# Altium PCB MS9333_PCB.PcbDoc
Units mil, origin at the board's own origin, x right, y up, seen from the top; angles counter-clockwise.
Board outline not stored, 2 copper layers (Top Layer, Bottom Layer); 52 components, 0 nets, 190 pads, 0 vias.
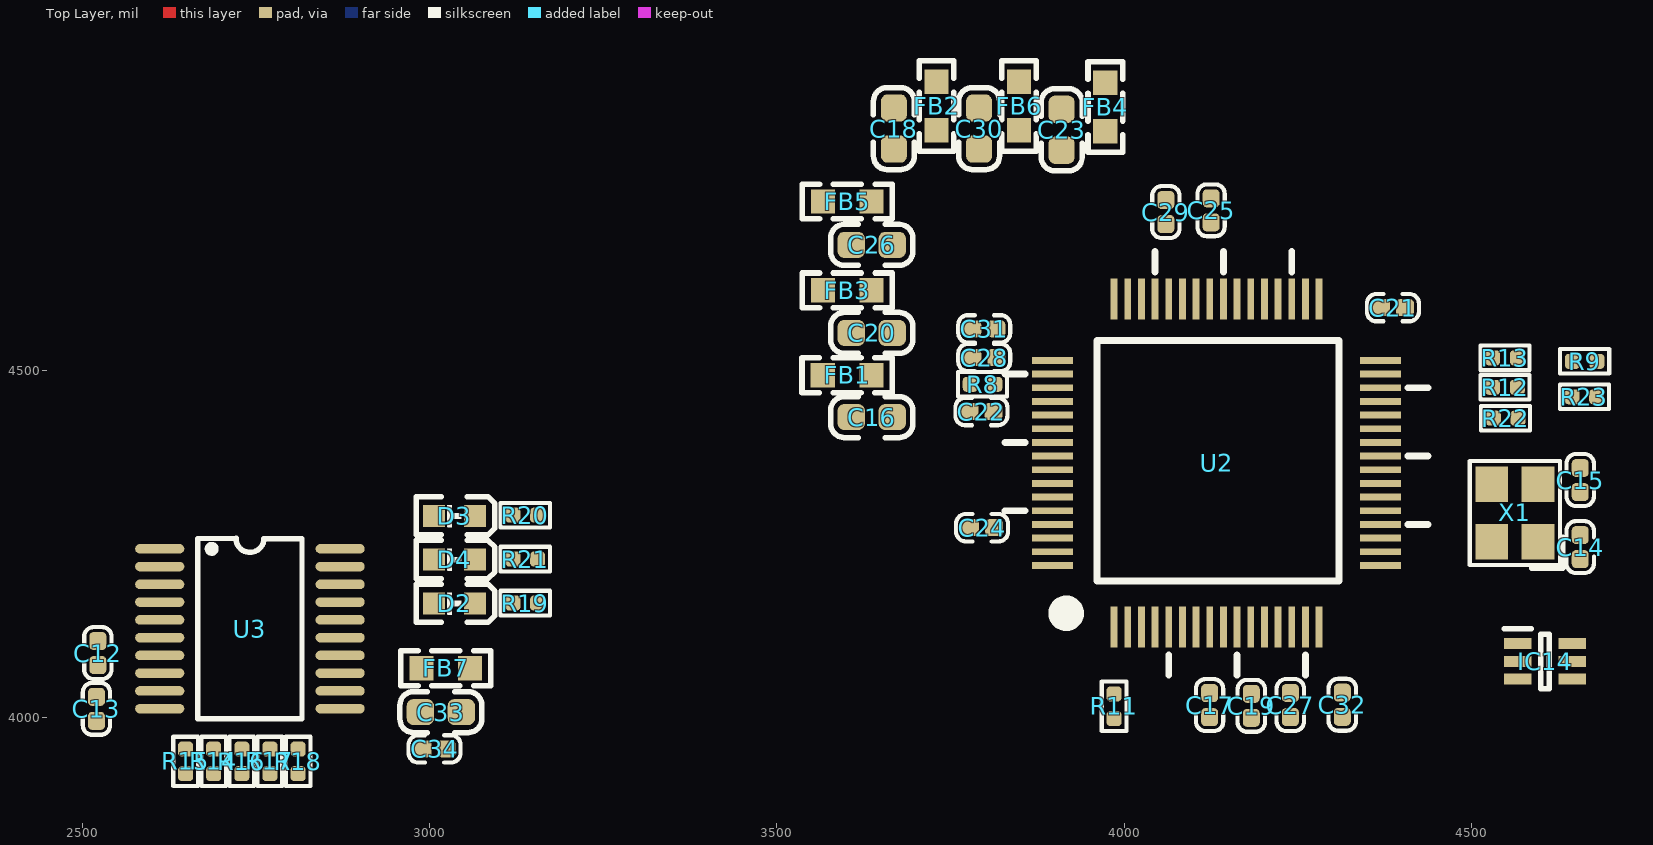
[diagram p0: Top Layer view]
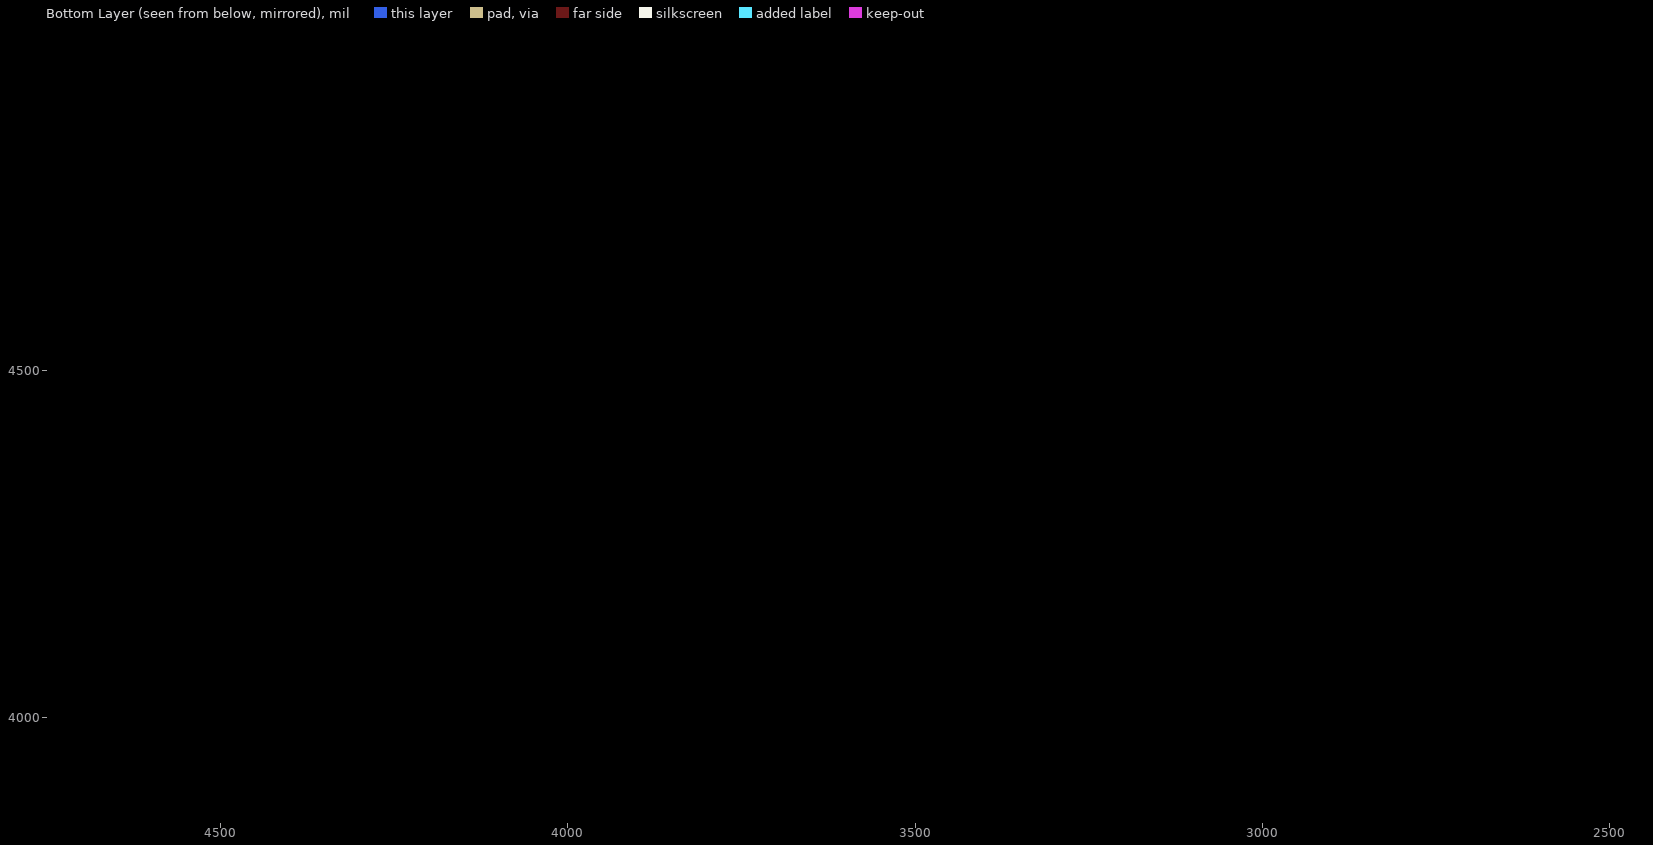
[diagram p1: Bottom Layer view, seen from below]

## Layer stack, top to bottom
Top Solder: solder mask 0.4, Solder Resist, Dk 3.5
Top Layer: signal copper 1.4
Dielectric 1: dielectric 12.6, FR-4, Dk 4.8
Bottom Layer: signal copper 1.4
Bottom Solder: solder mask 0.4, Solder Resist, Dk 3.5

## Components (designator, comment, footprint, x,y, rotation, side; value= is the part's Value field where it differs from the comment)
C12 "1uF" C_0402 2522.08,4093.35 r270 top
C13 "1uF" C_0402 2520.08,4013.03 r270 top
C14 "22pF" C_0402 4656.74,4245.95 r270 top
C15 "22pF" C_0402 4656.74,4342.52 r270 top
C16 "10uF" C_0603 3636.5,4433.19 r180 top
C17 "100nF" C_0402 4123.08,4018.35 r270 top
C18 "10uF" C_0603 3668.5,4848.62 r90 top
C19 "100nF" C_0402 4183.08,4017.35 r270 top
C20 "10uF" C_0603 3636.5,4554.35 r180 top
C21 "100nF" C_0402 4387.01,4590.75 r0 top
C22 "100nF" C_0402 3794.49,4441.14 r180 top
C23 "10uF" C_0603 3910.02,4846.94 r90 top
C24 "100nF" C_0402 3795.47,4273.82 r180 top
C25 "100nF" C_0402 4125.2,4730.91 r90 top
C26 "10uF" C_0603 3636.5,4681.19 r180 top
C27 "100nF" C_0402 4239.31,4018.51 r270 top
C28 "100nF" C_0402 3798.57,4518.84 r180 top
C29 "100nF" C_0402 4060.08,4728.35 r90 top
C30 "10uF" C_0603 3791.14,4848.62 r90 top
C31 "100nF" C_0402 3798.57,4560.18 r180 top
C32 "100nF" C_0402 4314.17,4018.9 r270 top
C33 "10uF" C_0603 3016.08,4008.35 r0 top
C34 "100nF" C_0402 3007.08,3955.35 r0 top
D2 "Green" LED-0603-G 3035.64,4164.95 r0 top
D3 "Green" LED-0603-G 3035.64,4290.93 r0 top
D4 "Green" LED-0603-G 3035.64,4228.02 r0 top
FB1 "CBG160808U121T" 0603L 3601.08,4493.35 r0 top
FB2 "CBG160808U121T" 0603L 3729.83,4881.23 r270 top
FB3 "CBG160808U121T" 0603L 3601.27,4615.63 r0 top
FB4 "CBG160808U121T" 0603L 3972.91,4879.54 r270 top
FB5 "CBG160808U121T" 0603L 3601.27,4743.59 r0 top
FB6 "CBG160808U121T" 0603L 3848.72,4881.23 r270 top
FB7 "CBG160808U121T" 0603L 3023.08,4071.35 r180 top
IC14 "TS5A3159DCKR" SOT65P210X110-6N 4606.08,4081.35 r0 top
R8 "0Ω" R_0402 3796.08,4480.35 r180 top
R9 "20kΩ" R_0402 4663.08,4513.35 r0 top
R11 "10kΩ" R_0402 3985.43,4016.71 r90 top
R12 "10kΩ" R_0402 4548.44,4475.97 r180 top
R13 "10kΩ" R_0402 4548.44,4518.29 r180 top
R14 "10kΩ" R_0402 2688.86,3937.35 r90 top
R15 "10kΩ" R_0402 2648.36,3937.35 r90 top
R16 "10kΩ" R_0402 2729.36,3937.35 r90 top
R17 "10kΩ" R_0402 2769.87,3937.35 r90 top
R18 "10kΩ" R_0402 2810.37,3937.35 r90 top
R19 "10kΩ" R_0402 3137.58,4165.28 r0 top
R20 "10kΩ" R_0402 3137.58,4291.91 r0 top
R21 "10kΩ" R_0402 3137.58,4228.72 r0 top
R22 "1kΩ" R_0402 4549.29,4431.55 r0 top
R23 "1kΩ" R_0402 4662.8,4462.35 r0 top
U2 "MS9333" LQFP64-0.5 4133.07,4367.1 r0 top locked
U3 "MS8005F" TSSOP20 2741.08,4128.35 r0 top
X1 "XTAL-4P 24Mhz" "OSC 3225-4P" 4562.68,4295.16 r90 top

## Footprints (in the part's own frame and the unit in brackets; to place one, negate y for a bottom-side part, rotate by r counter-clockwise, add the part's x,y. Pads: shape width x height; smd on the part's side, far side on the other; paste and mask are expansions set on the pad)
0603L [mil] "小功率贴片电感"
  rect 35x35 smd: 1(-35,0) 2(35,0)
  silkscreen extent -65,-25 65,25, body extent -31,-16 31,15, height 31
C_0402 [mm] "Chip Capacitor, 2-Leads, Body 1.00x0.50mm, IPC Medium Density"
  rrect50% 0.66x0.62 smd: 1(-0.44,0) 2(0.44,0)
  silkscreen extent -0.95,-0.5 0.95,0.5, body extent -0.52,-0.27 0.53,0.28, height 0.55
C_0603 [mm] "Chip Capacitor, 2-Leads, Body 1.60x0.80mm, IPC Medium Density"
  rrect50% 1x0.95 smd: 1(-0.75,0) 2(0.75,0)
  silkscreen extent -1.5,-0.75 1.5,0.75, body extent -0.8,-0.4 0.8,0.4, height 0.87
LED-0603-G [mm] "Chip Diode, 2-Leads, Body 1.55x0.80mm, IPC Medium Density"
  rect 0.8x0.8 smd: A(-0.75,0) K(0.75,0)
  silkscreen extent -1.4,-0.7 1.48,0.7, body extent -0.8,-0.4 0.8,0.4, height 0.61
LQFP64-0.5 [mm]
  rect 0.25x1.5 smd: 1(-3.75,-6) 2(-3.25,-6) 3(-2.75,-6) 4(-2.25,-6) 5(-1.75,-6) 6(-1.25,-6) 7(-0.75,-6) 8(-0.25,-6) 9(0.25,-6) 10(0.75,-6) 11(1.25,-6) 12(1.75,-6) 13(2.25,-6) 14(2.75,-6) 15(3.25,-6) 16(3.75,-6) 33(3.75,6) 34(3.25,6) 35(2.75,6) 36(2.25,6) 37(1.75,6) 38(1.25,6) 39(0.75,6) 40(0.25,6) 41(-0.25,6) 42(-0.75,6) 43(-1.25,6) 44(-1.75,6) 45(-2.25,6) 46(-2.75,6) 47(-3.25,6) 48(-3.75,6)
  rect 1.5x0.25 smd: 17(6,-3.75) 18(6,-3.25) 19(6,-2.75) 20(6,-2.25) 21(6,-1.75) 22(6,-1.25) 23(6,-0.75) 24(6,-0.25) 25(6,0.25) 26(6,0.75) 27(6,1.25) 28(6,1.75) 29(6,2.25) 30(6,2.75) 31(6,3.25) 32(6,3.75) 49(-6,3.75) 50(-6,3.25) 51(-6,2.75) 52(-6,2.25) 53(-6,1.75) 54(-6,1.25) 55(-6,0.75) 56(-6,0.25) 57(-6,-0.25) 58(-6,-0.75) 59(-6,-1.25) 60(-6,-1.75) 61(-6,-2.25) 62(-6,-2.75) 63(-6,-3.25) 64(-6,-3.75)
  silkscreen extent -7.74,-7.76 7.74,7.73, body extent -6,-5.99 6,6.02, height 1.45
"OSC 3225-4P" [mm]
  rect 1.3x1.2 smd: 1(-1.05,-0.85) 2(1.05,-0.85) 3(1.05,0.85) 4(-1.05,0.85)
  silkscreen extent -2.03,-1.75 1.91,1.65, body extent -1.6,-1.25 1.6,1.25, height 0.7
R_0402 [mm] "Chip Resistor, 2-Leads, Body 1.00x0.50mm, IPC Medium Density"
  rrect50% 0.55x0.55 smd: 1(-0.45,0) 2(0.45,0)
  silkscreen extent -0.9,-0.45 0.9,0.45, body extent -0.5,-0.27 0.5,0.28, height 0.4
SOT65P210X110-6N [mm]
  rect 1x0.4 smd: 1(-1,0.65) 2(-1,0) 3(-1,-0.65) 4(1,-0.65) 5(1,0) 6(1,0.65)
  silkscreen extent -1.5,-1 0.15,1.2, body extent -1.05,-1 1.05,1, height 1.1
TSSOP20 [mm]
  oval 1.8x0.35 smd: 1(-3.3,2.925) 2(-3.3,2.275) 3(-3.3,1.625) 4(-3.3,0.975) 5(-3.3,0.325) 6(-3.3,-0.325) 7(-3.3,-0.975) 8(-3.3,-1.625) 9(-3.3,-2.275) 10(-3.3,-2.925) 11(3.3,-2.925) 12(3.3,-2.275) 13(3.3,-1.625) 14(3.3,-0.975) 15(3.3,-0.325) 16(3.3,0.325) 17(3.3,0.975) 18(3.3,1.625) 19(3.3,2.275) 20(3.3,2.925)
  silkscreen extent -1.91,-3.3 1.91,3.3, body extent -3.28,-3.25 3.13,3.25, height 1.03

## Part data
C12 C13 C14 C15 C16 C17 C18 C19 C20 C21 C22 C23 C24 C25 C26 C27 C28 C29 C30 C31 C32 C33 C34: library part Cap_Chip, "贴片电容"
D2 D3 D4: library part LED_Chip, "贴片LED"
FB1 FB2 FB3 FB4 FB5 FB6 FB7: library part FB, "120R 100Mhz", LCSC=C50843, Manufacturer_Name=FH(风华), Manufacturer_Part_Number=CBG160808U121T
IC14: "Integrated Circuit", LCSC=C46388, Manufacturer_Name="Texas Instruments", Manufacturer_Part_Number=TS5A3159DCKR
R8 R9 R11 R12 R13 R14 R15 R16 R17 R18 R19 R20 R21 R22 R23: library part Res_Chip, "贴片电阻"
U2: "HDMI 一分二", Manufacturer_Name=MacroSilicon(宏晶微), Manufacturer_Part_Number=MS9333
U3: library part MS8005F_TSSOP20, "MCU", Manufacturer_Name=MacroSilicon(宏晶微), Manufacturer_Part_Number=MS8005F
X1: library part XTAL-4P, "4脚无源晶振", LCSC=C426976, Manufacturer_Name=GHC(晶光华), Manufacturer_Part_Number=S3224000151050

## Nets (pads, with @x,y where several pads share a name; then routed paths per layer and width w, separated by ;. In a path a pad name is that pad's centre, name@x,y a point inside that pad or via, vN(x,y) a via of type N, cw(c..) or ccw(c..) an arc to the next point about the centre after c; other vN are vias at no path point)
pads on no net: C12.1 C12.2 C13.1 C13.2 C14.1 C14.2 C15.1 C15.2 C16.1 C16.2 C17.1 C17.2 C18.1 C18.2 C19.1 C19.2 C20.1 C20.2 C21.1 C21.2 C22.1 C22.2 C23.1 C23.2 C24.1 C24.2 C25.1 C25.2 C26.1 C26.2 C27.1 C27.2 C28.1 C28.2 C29.1 C29.2 C30.1 C30.2 C31.1 C31.2 C32.1 C32.2 C33.1 C33.2 C34.1 C34.2 D2.A D2.K D3.A D3.K D4.A D4.K FB1.1 FB1.2 FB2.1 FB2.2 FB3.1 FB3.2 FB4.1 FB4.2 FB5.1 FB5.2 FB6.1 FB6.2 FB7.1 FB7.2 IC14.1 IC14.2 IC14.3 IC14.4 IC14.5 IC14.6 R8.1 R8.2 R9.1 R9.2 R11.1 R11.2 R12.1 R12.2 R13.1 R13.2 R14.1 R14.2 R15.1 R15.2 R16.1 R16.2 R17.1 R17.2 R18.1 R18.2 R19.1 R19.2 R20.1 R20.2 R21.1 R21.2 R22.1 R22.2 R23.1 R23.2 U2.1 U2.2 U2.3 U2.4 U2.5 U2.6 U2.7 U2.8 U2.9 U2.10 U2.11 U2.12 U2.13 U2.14 U2.15 U2.16 U2.17 U2.18 U2.19 U2.20 U2.21 U2.22 U2.23 U2.24 U2.25 U2.26 U2.27 U2.28 U2.29 U2.30 U2.31 U2.32 U2.33 U2.34 U2.35 U2.36 U2.37 U2.38 U2.39 U2.40 U2.41 U2.42 U2.43 U2.44 U2.45 U2.46 U2.47 U2.48 U2.49 U2.50 U2.51 U2.52 U2.53 U2.54 U2.55 U2.56 U2.57 U2.58 U2.59 U2.60 U2.61 U2.62 U2.63 U2.64 U3.1 U3.2 U3.3 U3.4 U3.5 U3.6 U3.7 U3.8 U3.9 U3.10 U3.11 U3.12 U3.13 U3.14 U3.15 U3.16 U3.17 U3.18 U3.19 U3.20 X1.1 X1.2 X1.3 X1.4